# Altium PCB CurrentSource.PcbDoc
Units mil, origin at the board's own origin, x right, y up, seen from the top; angles counter-clockwise.
Board outline 6070 x 1885 mil, 4 copper layers (Top Layer, GND, Power lines, Bottom Layer), stack 21.708 mil thick; 64 components, 40 nets, 232 pads, 585 vias.
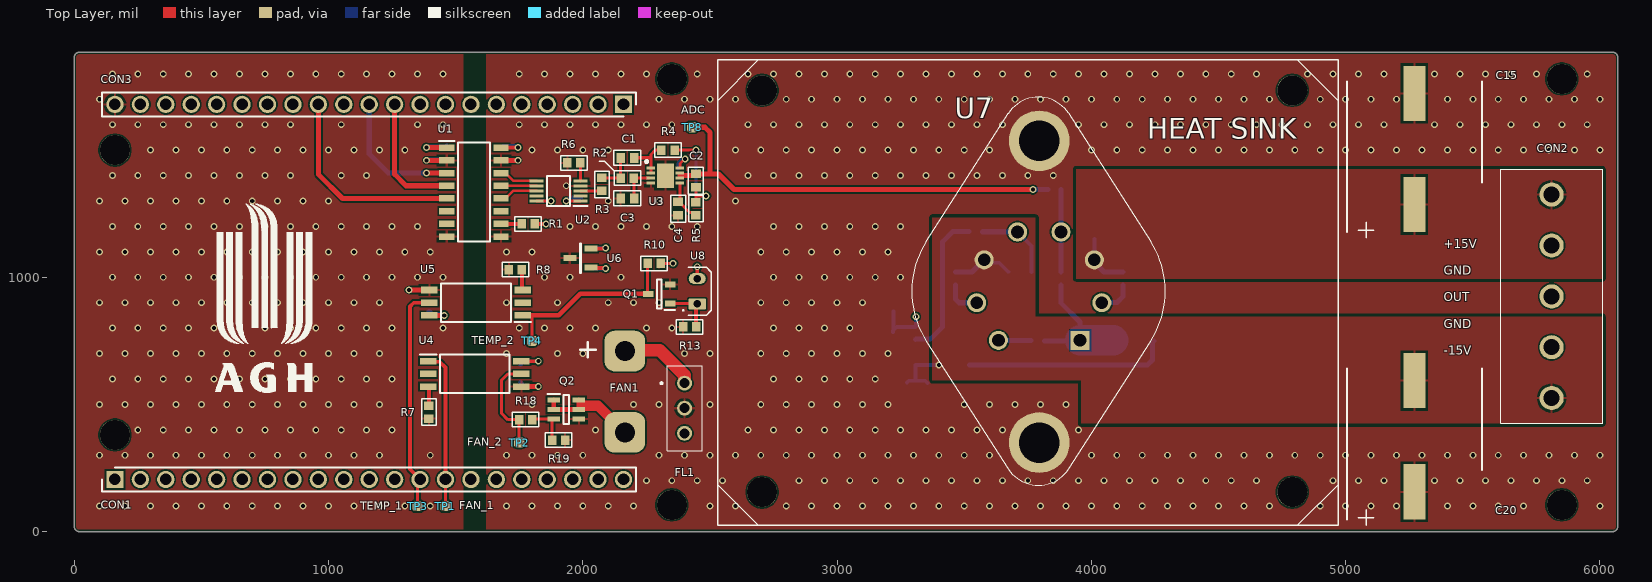
[diagram p0: Top Layer view]
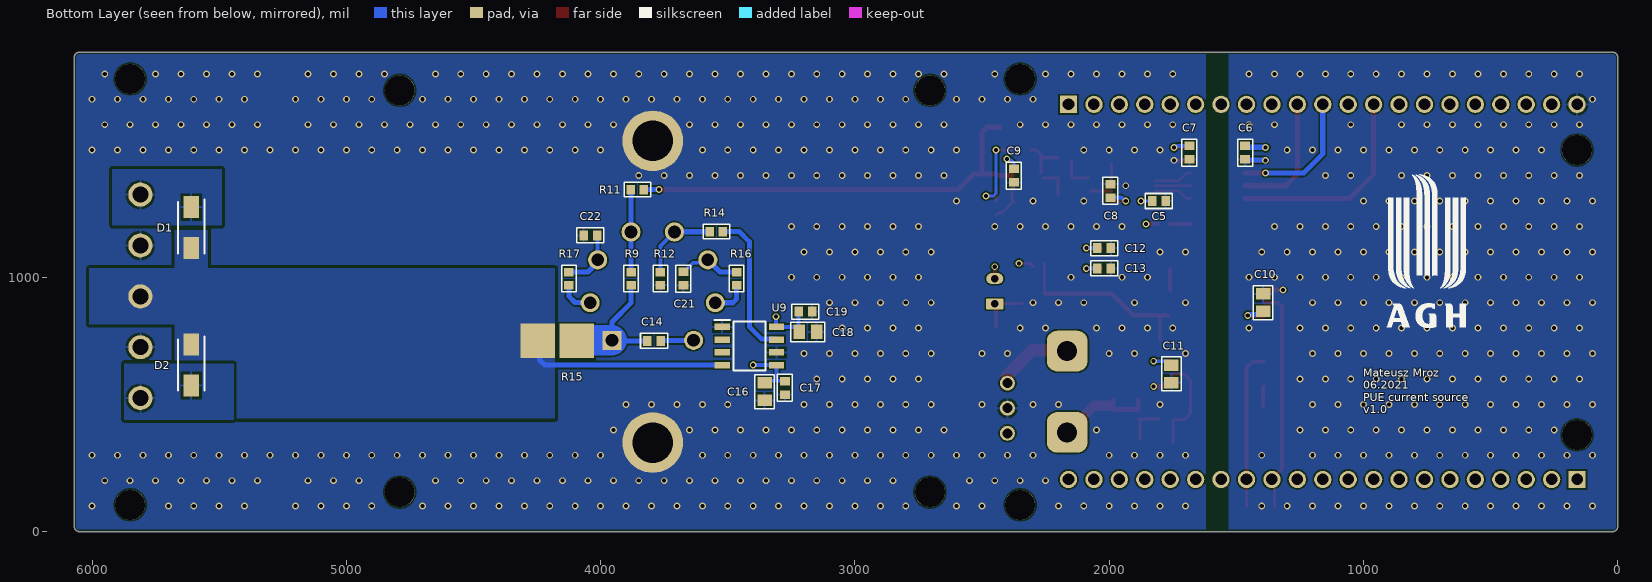
[diagram p1: Bottom Layer view, seen from below]
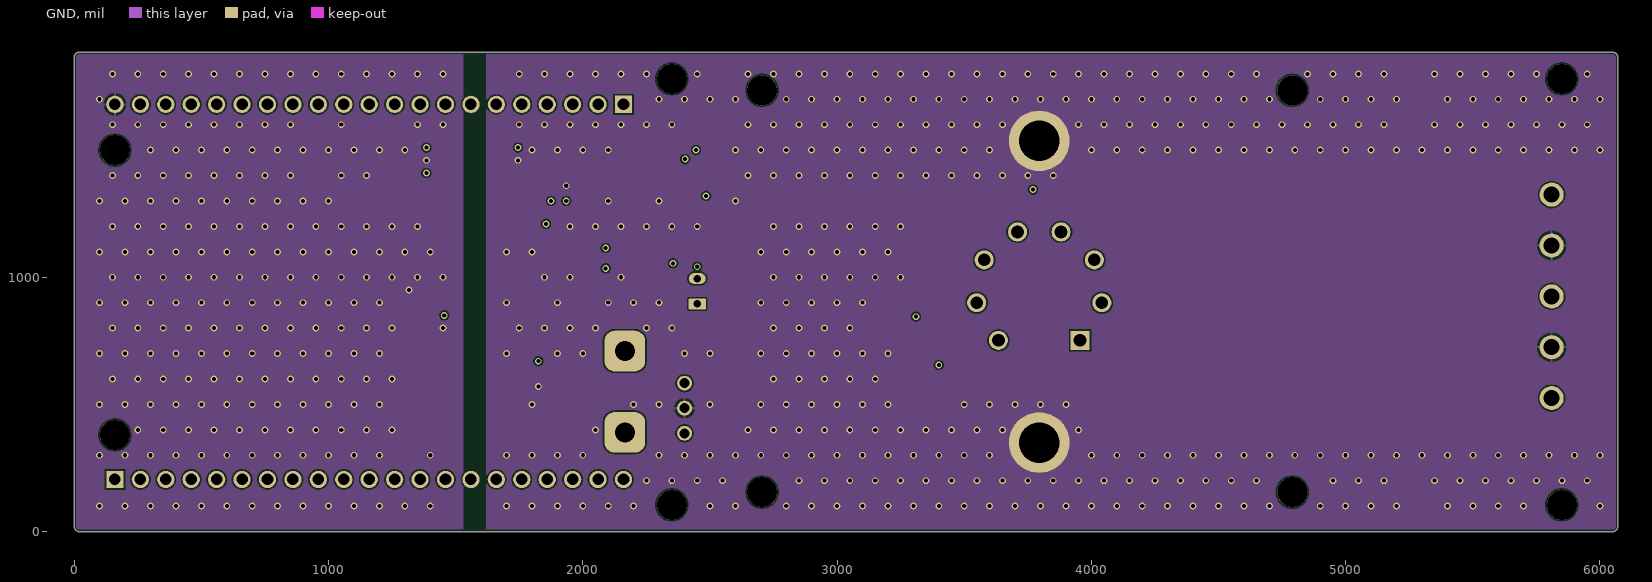
[diagram p2: GND]
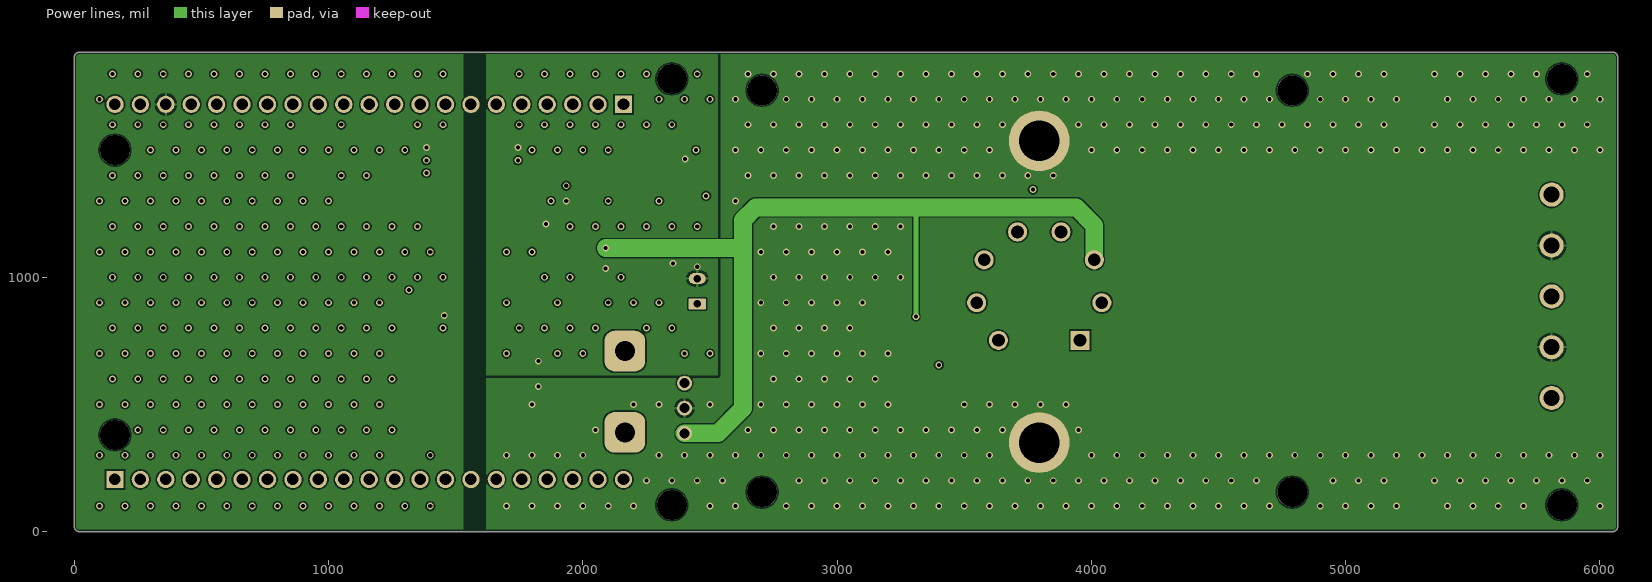
[diagram p3: Power lines]

## Layer stack, top to bottom
Top Solder: solder mask 0.4, Solder Resist, Dk 3.5
Top Layer: signal copper 1.4
Dielectric 2: prepreg 2.8, PP-006, Dk 4.1
GND: signal copper 0.354
Dielectric 1: dielectric 12.6, FR-4, Dk 4.8
Power lines: signal copper 0.354
Dielectric 3: prepreg 2.8, PP-006, Dk 4.1
Bottom Layer: signal copper 1.4
Bottom Solder: solder mask 0.4, Solder Resist, Dk 3.5

## Board outline
20,0 cw(c20,20) 0,20 0,1865 cw(c20,1865) 20,1885 6050,1885 cw(c6050,1865) 6070,1865 6070,20 cw(c6050,20) 6050,0

## Design rules (kind name [scope] priority, off if disabled: settings)
BoardOutlineClearance [All] p1: gap=8 ignorepadtopadclearanceinfootprint=FALSE
Clearance "Clerance poly" [InPolygon vs InPolygon] p1: gap=12 ignorepadtopadclearanceinfootprint=FALSE
Clearance [All] p2: gap=6 ignorepadtopadclearanceinfootprint=FALSE except(10: Arc-Via Track-Via)
HoleSize [All] p1: absolutevalues=TRUE maxlimit=248 minlimit=8 maxpercent=80.000 minpercent=20.000
MatchedLengths EEPROM_SPI_2 [InNetClass('EEPROM_SPI_2')] p1: tolerance=100 checknetsindiffpair=FALSE checkdiffpairvsdiffpair=TRUE checkxsignals=TRUE checkothers=TRUE
MatchedLengths EEPROM_SPI_1 [InNetClass('EEPROM_SPI_1')] p2: tolerance=10 checknetsindiffpair=FALSE checkdiffpairvsdiffpair=TRUE checkxsignals=TRUE checkothers=TRUE
MinimumAnnularRing [All] p1: minimumring=5.5
MinimumSolderMaskSliver [All] p1: minsoldermaskwidth=0
NetAntennae [All] p1: netantennaetolerance=3.94
PlaneConnect [Not IsVia] p1: planeconnectstyle=Relief reliefexpansion=20 reliefentries=4 reliefconductorwidth=10 reliefairgap=10
PlaneConnect PlaneConnect_via [IsVia] p2: planeconnectstyle=Direct reliefexpansion=20 reliefentries=4 reliefconductorwidth=10 reliefairgap=10
PlaneConnect PlaneConnect_out [NetCON2_3] p3: planeconnectstyle=Direct reliefexpansion=20 reliefentries=4 reliefconductorwidth=10 reliefairgap=10
PolygonConnect PolygonConnect_opamp [All vs HasFootprint('PA119CE')] p1: connectstyle=Direct reliefconductorwidth=10 reliefentries=4 polygonreliefangle="90 Angle" airgapwidth=10
PolygonConnect PolygonConnect_out [All vs InNet('NetCON2_3')] p2: connectstyle=Direct reliefconductorwidth=10 reliefentries=4 polygonreliefangle="90 Angle" airgapwidth=10
PolygonConnect PolygonConnect_via [All vs IsVia] p3: connectstyle=Direct reliefconductorwidth=10 reliefentries=4 polygonreliefangle="90 Angle" airgapwidth=10
PolygonConnect [All vs Not IsVia] p4: connectstyle=Relief reliefconductorwidth=10 reliefentries=4 polygonreliefangle="90 Angle" airgapwidth=10
RoutingVias [All] p1: holewidth=28 width=50 viastyle="Through Hole" minholewidth=8 minwidth=16 maxholewidth=28 maxwidth=50
SilkToSilkClearance [All] p1: silktosilkclearance=0
SilkToSolderMaskClearance [IsPad] p1: minsilkscreentomaskgap=6 clearancetoexposedcopper=TRUE
SolderMaskExpansion SolderMaskExpansion_via [IsVia] p1: expansion=4 istentingtop=TRUE
SolderMaskExpansion [All] p2: expansion=4 istentingtop=FALSE
UnRoutedNet [All] p1: checkbadconnections=TRUE
Width "Width Logo" [WithinRoom('Logo')] p1: maxlimit=10 minlimit=99999 preferedwidth=10 toplayer_minwidth=0 midlayer1_minwidth=0 midlayer2_minwidth=0 bottomlayer_minwidth=0 minimp=50.000000 maximp=50.000000 favimp=50.000000
Width [All] p2: maxlimit=150 minlimit=6 preferedwidth=10
23 further rules are at their usual default settings.

## Classes and differential pairs
component class Designator: C14 C15 C16 C17 C18 C19 C20 C21 C22 D1 D2 FAN1 FL1 Q1 Q2 R9 R10 R11 R12 R13 R14 R15 R16 R17 R18 R19 TP8 U7 U8 U9

## Components (designator, comment, footprint, x,y, rotation, side; value= is the part's Value field where it differs from the comment)
C1 "100p" Cap_0603_MD_outline 2175,1470 r180 top
C2 "100p" Cap_0603_MD_outline 2445,1380 r270 top
C3 "10p" Cap_0603_MD_outline 2175,1310 r0 top
C4 "10p" Cap_0603_MD_outline 2375,1270 r90 top
C5 "100n" Cap_0603_MD_outline 1805,1300 r0 bottom
C6 "100n" Cap_0603_MD_outline 1465,1490 r90 bottom
C7 "100n" Cap_0603_MD_outline 1685,1490 r90 bottom
C8 "100n" Cap_0603_MD_outline 1995,1340 r270 bottom
C9 "100n" Cap_0603_MD_outline 2375,1400 r90 bottom
C10 "1u" Cap_0805_MD_outline 1395,900 r270 bottom
C11 "1u" Cap_0805_MD_outline 1755,620 r90 bottom
C12 "100n" Cap_0603_MD_outline 2020,1115 r0 bottom
C13 "100n" Cap_0603_MD_outline 2020,1035 r0 bottom
C14 "82p" Cap_0603_MD_outline 3790,750 r180 bottom
C15 "1000u" CAPAE1350X1400N 5270,1505 r90 top
C16 "1u" Cap_0805_MD_outline 3355,550 r90 bottom
C17 "100n" Cap_0603_MD_outline 3275,565 r90 bottom
C18 "1u" Cap_0805_MD_outline 3185,785 r0 bottom
C19 "100n" Cap_0603_MD_outline 3195,865 r0 bottom
C20 "1000u" CAPAE1350X1400N 5270,375 r90 top
C21 "100n" Cap_0603_MD_outline 3675,995 r90 bottom
C22 "100n" Cap_0603_MD_outline 4040,1165 r180 bottom
CON1 "Socket 21" SOCKET_1X21_2.54 160,205 r0 top locked
CON2 "TB004-508-05BE" TB00450805BE 5810,525 r90 top
CON3 "Socket 21" SOCKET_1X21_2.54 2160,1680 r180 top locked
D1 "824500641" DIOM5127X250N 5610,1195 r270 bottom
D2 "824500641" DIOM5127X250N 5610,655 r270 bottom
FAN1 "Value" PADS_2 2165,550 r90 top
FL1 "DSS1NB32A222Q55B" DSS1NB32A223Q91A 2400,485 r270 top
Q1 "MMBT3904VL" SOT95P230X110-3N 2300,935 r180 top
Q2 "PMN30UNX" SOT95P275X110-6N 1935,480 r0 top
R1 "10k" Res_0603_MD_outline 1785,1210 r180 top
R2 "19k1" Res_0603_MD_outline 2175,1390 r0 top
R3 "5k36" Res_0603_MD_outline 2075,1365 r270 top
R4 "1k78" Res_0603_MD_outline 2335,1500 r0 top
R5 "57k6" Res_0603_MD_outline 2445,1270 r270 top
R6 "10k" Res_0603_MD_outline 1965,1450 r0 top
R7 "300R" Res_0603_MD_outline 1395,470 r90 top
R8 "300R" Res_0603_MD_outline 1735,1030 r0 top
R9 "470R" Res_0603_MD_outline 3880,995 r270 bottom
R10 "100k" Res_0603_MD_outline 2280,1055 r0 top
R11 "10k" Res_0603_MD_outline 3855,1345 r0 bottom
R12 "10k" Res_0603_MD_outline 3765,995 r90 bottom
R13 "7k5" Res_0603_MD_outline 2420,805 r0 top
R14 "470R" Res_0603_MD_outline 3545,1180 r0 bottom
R15 "0.047R" Res_2512 4170,750 r180 bottom
R16 "0.1R" Res_0603_MD_outline 3465,995 r90 bottom
R17 "0.1R" Res_0603_MD_outline 4125,995 r90 bottom
R18 "100R" Res_0603_MD_outline 1775,440 r180 top
R19 "10k" Res_0603_MD_outline 1905,360 r180 top
TP1 "FAN_1" TP_SQ40 1460,100 r90 top
TP2 "FAN_2" TP_SQ40 1750,350 r90 top
TP3 "TEMP_1" TP_SQ40 1350,100 r90 top
TP4 "TEMP_2" TP_SQ40 1800,750 r90 top
TP8 "ADC" TP_SQ40 2430,1590 r90 top
U1 "ADUM130E0BRZ" SOIC127P600X175-16N 1571.77,1335 r0 top
U2 "DAC80501ZDGST" SOP50P490X110-10N 1905,1340 r180 top
U3 "ADA4084" SON50P300X300X85-9N-D 2325,1400 r0 top
U4 "TLP5754H" SOIC127P1000X230-6N 1575,620 r0 top
U5 "TLP5754H" SOIC127P1000X230-6N 1580,900 r180 top
U6 "TLV76050DBZT" SOT95P237X112-3N 1990,1075 r180 top
U7 "PA119CE" PA119CE 3952.63,753.97 r90 top
U8 "Temp sensor" TO-92S 2450,945 r90 top
U9 "INA849DR" SOIC127P600X175-8N 3415,730 r180 bottom

## Footprints (in the part's own frame and the unit in brackets; to place one, negate y for a bottom-side part, rotate by r counter-clockwise, add the part's x,y. Pads: shape width x height; smd on the part's side, far side on the other; paste and mask are expansions set on the pad)
Cap_0603_MD_outline [mm] "Chip Capacitor, 0603, IPC Medium Density with outline"
  rect 0.85x1 smd: 1(-0.675,0) 2(0.675,0)
  silkscreen extent -1.35,-0.75 1.35,0.75, body extent -0.87,-0.48 0.87,0.48, height 0.92
Cap_0805_MD_outline [mm] "Chip Capacitor, 0805, IPC Medium Density with outline"
  rect 1.15x1.45 smd: 1(-0.875,0) 2(0.875,0)
  silkscreen extent -1.7,-0.97 1.7,0.97, body extent -1.1,-0.72 1.1,0.72, height 1.45
CAPAE1350X1400N [mm]
  rect 5.5x2.2 smd: 1(-5.55,0) 2(5.55,0)
  silkscreen extent -8.88,-6.75 6.75,6.75, body extent -7.5,-6.85 7.5,6.85, height 14
DIOM5127X250N [mm]
  rect 2.2x1.55 smd: 1(-2.05,0) 2(2.05,0)
  silkscreen extent -2.83,-1.34 2.56,1.34, body extent -2.55,-1.34 2.56,1.33, height 2.5
DSS1NB32A223Q91A [mm]
  round 1.5 hole 1: 1(-2.5,0) 2(0,0) 3(2.5,0)
  silkscreen extent -4.25,-2.4 4.25,1.75, body extent -3.77,-1.27 3.77,1.27, height 7.64
PA119CE [mm]
  rect 1.905x1.905 hole 1.27: 1(-0.051,-0.076)
  round 1.905 hole 1.27: 2(3.709,-2.246) 3(7.989,-1.496) 4(10.779,1.834) 5(10.779,6.174) 6(7.989,9.504) 7(3.709,10.254) 8(-0.051,8.084)
  round 6.06 hole 4.04: MH1(-10.261,4.004) MH2(19.879,4.004)
  silkscreen extent -14.53,-8.59 24.25,16.75, body extent -20.84,-16.6 31.82,27.08, height 22.86
PADS_2 [mil] "2 Pads, hole 2mm"
  rrect50% 160x160 hole 78.74: 1(-160,0) 2(160,0)
Res_0603_MD_outline [mm] "Chip Resistor, 0603, IPC Medium Density with outline"
  rect 0.85x0.95 smd: 1(-0.65,0) 2(0.65,0)
  silkscreen extent -1.33,-0.72 1.33,0.72, body extent -0.87,-0.48 0.87,0.48, height 0.5
Res_2512 [mm]
  rect 3.45x3.45 smd: 1(-1.95,0) 2(1.95,0)
  body extent -3.2,-1.6 3.2,1.6, height 0.55
SOCKET_1X21_2.54 [mm] "Socket connector 2.54mm"
  rect 1.725x1.725 hole 1.15: 1(0,0)
  round 1.725 hole 1.15: 2(2.54,0) 3(5.08,0) 4(7.62,0) 5(10.16,0) 6(12.7,0) 7(15.24,0) 8(17.78,0) 9(20.32,0) 10(22.86,0) 11(25.4,0) 12(27.94,0) 13(30.48,0) 14(33.02,0) 15(35.56,0) 16(38.1,0) 17(40.64,0) 18(43.18,0) 19(45.72,0) 20(48.26,0) 21(50.8,0)
  silkscreen extent -1.27,-1.2 52.07,1.2, body extent -1.52,-1.27 52.19,1.27, height 8.5
SOIC127P600X175-8N [mm]
  rect 1.525x0.65 smd: 1(-2.712,1.905) 2(-2.712,0.635) 3(-2.712,-0.635) 4(-2.712,-1.905) 5(2.712,-1.905) 6(2.712,-0.635) 7(2.712,0.635) 8(2.712,1.905)
  silkscreen extent -3.47,-2.45 1.6,2.58, body extent -3,-2.45 3,2.45, height 1.75
SOIC127P600X175-16N [mm]
  rect 1.525x0.65 smd: 1(-2.712,4.445) 2(-2.712,3.175) 3(-2.712,1.905) 4(-2.712,0.635) 5(-2.712,-0.635) 6(-2.712,-1.905) 7(-2.712,-3.175) 8(-2.712,-4.445) 9(2.712,-4.445) 10(2.712,-3.175) 11(2.712,-1.905) 12(2.712,-0.635) 13(2.712,0.635) 14(2.712,1.905) 15(2.712,3.175) 16(2.712,4.445)
  silkscreen extent -3.47,-4.95 1.6,5.12, body extent -3,-4.95 3,4.95, height 1.75
SOIC127P1000X230-6N [mm]
  rect 1.65x0.65 smd: 1(-4.65,1.27) 2(-4.65,0) 3(-4.65,-1.27) 4(4.65,-1.27) 5(4.65,0) 6(4.65,1.27)
  silkscreen extent -5.48,-1.92 3.47,1.94, body extent -5,-1.92 5,1.92, height 2.3
SON50P300X300X85-9N-D [mm]
  rect 0.85x0.3 smd: 1(-1.45,0.75) 2(-1.45,0.25) 3(-1.45,-0.25) 4(-1.45,-0.75) 5(1.45,-0.75) 6(1.45,-0.25) 7(1.45,0.25) 8(1.45,0.75)
  rect 1.7x2.44 smd: 4(0,0)
  silkscreen extent -2,1.28 -1.75,1.52, body extent -1.55,-1.5 1.55,1.5, height 0.85
SOP50P490X110-10N [mm]
  rect 1.4x0.3 smd: 1(-2.2,1) 2(-2.2,0.5) 3(-2.2,0) 4(-2.2,-0.5) 5(-2.2,-1) 6(2.2,-1) 7(2.2,-0.5) 8(2.2,0) 9(2.2,0.5) 10(2.2,1)
  silkscreen extent -2.9,-1.5 1.15,1.5, body extent -2.45,-1.5 2.45,1.5, height 1.1
SOT95P230X110-3N [mm]
  rect 1.05x0.6 smd: 1(-1.1,0.95) 2(-1.1,-0.95) 3(1.1,0)
  silkscreen extent -1.6,-1.45 0.23,1.6, body extent -1.15,-1.45 1.15,1.45, height 1.1
SOT95P237X112-3N [mm]
  rect 1.3x0.6 smd: 1(-1.05,0.95) 2(-1.05,-0.95) 3(1.05,0)
  silkscreen extent -0.05,-1.46 0.05,1.46, body extent -1.18,-1.46 1.18,1.46, height 1.12
SOT95P275X110-6N [mm]
  rect 1.25x0.5 smd: 1(-1.25,0) 1(-1.25,0.95) 1(1.25,0) 1(1.25,0.95) 3(-1.25,-0.95) 4(1.25,-0.95)
  silkscreen extent -1.88,-1.45 0.28,1.55, body extent -1.37,-1.47 1.38,1.48, height 1.01
TB00450805BE [mm]
  round 2.4 hole 1.6: 1(0,0) 2(5.08,0) 3(10.16,0) 4(15.24,0) 5(20.32,0)
  silkscreen extent -2.54,-5.08 22.86,5.08, body extent -3.09,-5.12 22.91,5.08, height 14.1
TO-92S [mm] "TI 2 Pin temp sensor"
  rrect10% 1.07x1.7 hole 0.75: 1(-1.27,0)
  rrect100% 1.07x1.7 hole 0.75: 2(1.27,0)
  silkscreen extent -2.41,-1.4 2.41,1.45, body extent -2.05,-1.07 2.05,0.55, height 7.33
TP_SQ40 [mil] "Testpoint square 40x40mil"
  rrect50% 40x40 smd: 1(0,0)

## Part data
C1 C2: library part Capacitor, "Capacitor", MPN=GQM1875C2E101JB12D, Package=0603
C3 C4: library part Capacitor, "Capacitor", MPN=GRM1885C2E100JW07D, Package=0603
C5 C6 C7 C8 C9 C12 C13 C17 C19 C21 C22: library part Capacitor, "Capacitor", MPN=GRM188R72A104KA35, Package=0603
C10 C11: library part Capacitor, "Capacitor", MPN=GRM219R7YA105KA12, Package=0805
C14: library part Capacitor, "Capacitor", MPN=GQM1875C2E820JB12D, Package=0603
C15 C20: library part "Capacitor Electrolytic", "Aluminium Electrolytic Capacitor", MPN=EEE-FK1E102AQ
C16 C18: library part Capacitor, "Capacitor", MPN=GCJ21BR71H105KA01L, Package=0803
CON1 CON3: "Socket, 21-Pin", System=Connector
  CON1: Location=Bottom
  CON3: Location=Top
CON2: "Terminal Block Screw", MPN=TB004-508-05BE
D1 D2: "TVS Diode", MPN=824500641
FAN1: library part Pads_2, "2 Pads"
FL1: "EMIFilter", MPN=DSS1NB32A222Q55B
Q1: "Transistor BJT NPN", MPN=MMBT3904VL
Q2: "Transistor MOSFET N-Channel", MPN=PMN30UNX
R1 R6 R19: library part Resistor, "Resistor", MPN=CRCW060310K0FKEAC, Package=0603
R2: library part Resistor, "Resistor", MPN=CRCW060319K1FKTA, Package=0603
R3: library part Resistor, "Resistor", MPN=CRCW06035K36FKEA, Package=0603
R4: library part Resistor, "Resistor", MPN=CRCW06031K78FKTA, Package=0603
R5: library part Resistor, "Resistor", MPN=CRCW060357K6FKEA, Package=0603
R7 R8: library part Resistor, "Resistor", MPN=CRCW0603300RFKEAC, Package=0603
R9 R14: library part Resistor, "Resistor", MPN=MCT0603MD4700BP100, Package=0603
R10: library part Resistor, "Resistor", MPN=CRCW0603100KFKEAC, Package=0603
R11 R12: library part Resistor, "Resistor", MPN=MCT06030E1002BP100, Package=0603
R13: library part Resistor, "Resistor", MPN=CRCW06037K50FKEA, Package=0603
R15: library part Shunt, "Resistor", MPN=GMR100HTBFQR047, Package=2512
R16 R17: library part Resistor, "Resistor", MPN=RCWE0603R100FNEA, Package=0603
R18: library part Resistor, "Resistor", MPN=CRCW0603100RFKEAHP, Package=0603
TP1 TP2 TP3 TP4 TP8: library part TestPoint, "Test point"
U1: "Digital isolator", MPN=ADUM130E0BRZ
U2: "DAC", MPN=DAC80501ZDGST, Resolution=16bit
U3: library part ADA4084-2ACPZ-R7, "Op Amp", MPN=ADA4084-2ACPZ-R7
U4 U5: "Optocoupler", MPN=TLP5754H(TP4,E
U6: "Voltage Regulator 5V", MPN=TLV76050DBZT
U7: "Op Amp", MPN=PA119CE
U8: library part LMT01LPGM, "Temperature sensor, Pulse Train Interface", MPN=LMT01LPGM
U9: "Instrumental Amplifier", MPN=INA849DR

## Free pads (board coordinates)
  round 118.11 hole 118.11: ""(160,380) ""(160,1500) ""(2350,105) ""(2350,1780) ""(2705,155) ""(2705,1735) ""(4790,155) ""(4790,1735) ""(5850,105) ""(5850,1780)

## Via types
v1: diameter 27, hole 16, Top Layer to Bottom Layer, tented both sides, 585 vias

## Nets (pads, with @x,y where several pads share a name; then routed paths per layer and width w, separated by ;. In a path a pad name is that pad's centre, name@x,y a point inside that pad or via, vN(x,y) a via of type N, cw(c..) or ccw(c..) an arc to the next point about the centre after c; other vN are vias at no path point)
+5: C7.2 C8.2 C9.2 C11.2 C13.2 R1.1 R10.2 U1.16 U2.1 U3.8 U4.6 U6.1 U8.2 | length 756.6
  Top Layer w12: v1(1935,1300) 1935.54,1300.54 U2.1@1991.52,1300.54 ; R10.2@2300,1041.5 2305.59,1047.09 R10.2 v1(2355,1055) ; U3.8 2382.09,1447.09 2399.72,1464.72 v1(2402.6,1464.72) ; U8.2 v1(2450,1041.5)
  Top Layer w15: U1.16 v1(1745,1510) ; U4.6 v1(1825,670) ; R1.1 v1(1855,1210) ; U6.1 2032.64,1036.3 2088.7,1036.3 v1(2090,1035)
  Bottom Layer w12: C9.2 2375,1450 2386.85,1461.85 2399.73,1461.85 v1(2402.6,1464.72)
  Bottom Layer w15: C7.2 1735.18,1516.57 1741.75,1510 v1(1745,1510) ; C11.2 1770.14,669.59 1788.59,669.59 1789,670 v1(1825,670) ; v1(1935,1300) 1938.25,1300 1951.67,1313.43 C8.2 ; C13.2 v1(2090,1035)
+15: C12.2 C15.1 C18.2 C19.2 C22.2 CON2.5 D1.1 FL1.3 R17.2 U6.2 U7.3 U9.8 | length 4085.5
  Top Layer w15: U6.2 2032.64,1113.7 2088.7,1113.7 v1(2090,1115)
  Power lines w20: v1(3310,845) 3310,1275
  Power lines w70: v1(2090,1115) 2630,1115 ; FL1.3 2531.57,386.57 2630,485 2630,1115 ; U7.3 4011.54,1203.46 3940,1275 3310,1275 2680,1275 2630,1225 2630,1115
  Bottom Layer w15: C12.2 v1(2090,1115) ; C18.2 3219.45,789.86 C18.2@3221.57,791.99 ; C19.2 C18.2@3221.57,791.99 ; v1(3310,845) 3310,806.77 U9.8 3234.59,805 C18.2@3221.57,791.99 ; U7.3@4011.54,1058.46 U7.3 4012.48,1069.45 C22.2@4012.48,1150
  Bottom Layer w20: U7.3@4011.54,1058.46 4049.41,1020.59 R17.2
-15: C16.2 C17.2 C20.2 C21.2 CON2.1 D2.2 R16.2 U7.6 U9.5 | length 489.2
  Bottom Layer w15: C17.2@3275,586.57 3281.66,593.24 3308.23,593.24 ; C16.2 3346.21,593.24 3308.23,593.24 ; v1(3400,655) U9.5 3308.23,593.24 ; U7.6 3589.94,1057.02 3636.6,1057.02 3672.05,1021.57 C21.2
  Bottom Layer w20: R16.2 3530.55,1020.59 U7.6
AGND: C3.1 C4.1 C5.1 C7.1 C8.1 C9.1 C11.1 C12.1 C13.1 C15.2 C16.1 C17.1 C18.1 C19.1 C20.1 C21.1 C22.1 CON2.2 CON2.4 FL1.2 Q1.2 Q2.4 R6.1 R8.1 R12.1 R13.1 R19.1 U1.9 U1.15 U2.4 U3.4 U4.4 U6.3 U7.MH1 U7.MH2 U9.1 U9.6 | length 151.6
  Top Layer w20: U1.15 v1(1745,1460) ; U4.4 v1(1825,570)
  Bottom Layer w20: C11.1 C11.1@1767.64,572.91 ; v1@1824.74,569.74 v1(1825,570)
  other v1: 1700,100 1800,100 1900,100 2000,100 2100,100 2200,100 2500,100 2600,100 2800,100 2900,100 3000,100 3100,100 3200,100 3300,100 3400,100 3500,100 3600,100 3700,100 3800,100 3900,100 4000,100 4100,100 4200,100 4300,100 4400,100 4500,100 4600,100 4700,100 4900,100 5000,100 5100,100 5200,100 5400,100 5500,100 5600,100 5700,100 6000,100 2250,200 2350,200 2450,200 2550,200 2850,200 2950,200 3050,200 3150,200 3250,200 3350,200 3450,200 3550,200 3650,200 3750,200 3850,200 3950,200 4050,200 4150,200 4250,200 4350,200 4450,200 4550,200 4650,200 4950,200 5050,200 5150,200 5350,200 5450,200 5550,200 5650,200 5750,200 5850,200 5950,200 1700,300 1800,300 1900,300 2000,300 2300,300 2400,300 2500,300 2600,300 2700,300 2800,300 2900,300 3000,300 3100,300 3200,300 3300,300 3400,300 3500,300 3600,300 4000,300 4100,300 4200,300 4300,300 4400,300 4500,300 4600,300 4700,300 4800,300 4900,300 5000,300 5100,300 5200,300 5300,300 5400,300 5500,300 5600,300 5700,300 5800,300 5900,300 6000,300 2050,400 2650,400 2750,400 2850,400 2950,400 3050,400 3150,400 3250,400 3350,400 3450,400 3550,400 3650,400 3950,400 1800,500 2200,500 2300,500 2500,500 2700,500 2800,500 2900,500 3000,500 3100,500 3200,500 3500,500 3600,500 3700,500 3800,500 3900,500 2750,600 2850,600 2950,600 3050,600 3150,600 1700,700 1900,700 2000,700 2400,700 2500,700 2700,700 2800,700 2900,700 3000,700 3100,700 3200,700 1750,800 1850,800 1950,800 2050,800 2250,800 2350,800 2750,800 2850,800 2950,800 3050,800 1700,900 1900,900 2100,900 2200,900 2300,900 2700,900 2800,900 2900,900 3000,900 3100,900 1850,1000 1950,1000 2150,1000 2750,1000 2850,1000 2950,1000 3050,1000 3150,1000 3250,1000 1700,1100 1800,1100 2700,1100 2800,1100 2900,1100 3000,1100 3100,1100 3200,1100 1950,1200 2050,1200 2150,1200 2250,1200 2350,1200 2450,1200 2750,1200 2850,1200 2950,1200 3050,1200 3150,1200 3250,1200 2100,1300 2300,1300 2600,1300 1935,1360 2650,1400 2750,1400 2850,1400 2950,1400 3050,1400 3150,1400 3250,1400 3350,1400 3450,1400 3550,1400 3650,1400 3750,1400 3850,1400 1800,1500 1900,1500 2000,1500 2100,1500 2600,1500 2700,1500 2800,1500 2900,1500 3000,1500 3100,1500 3200,1500 3300,1500 3400,1500 3500,1500 3600,1500 4000,1500 4100,1500 4200,1500 4300,1500 4400,1500 4500,1500 4600,1500 4700,1500 4800,1500 4900,1500 5000,1500 5100,1500 5200,1500 5300,1500 5400,1500 5500,1500 5600,1500 5700,1500 5800,1500 5900,1500 6000,1500 1750,1600 1850,1600 1950,1600 2050,1600 2150,1600 2250,1600 2350,1600 2650,1600 2750,1600 2850,1600 2950,1600 3050,1600 3150,1600 3250,1600 3350,1600 3450,1600 3550,1600 3650,1600 3950,1600 4050,1600 4150,1600 4250,1600 4350,1600 4450,1600 4550,1600 4650,1600 4750,1600 4850,1600 4950,1600 5050,1600 5150,1600 5350,1600 5450,1600 5550,1600 5650,1600 5750,1600 5850,1600 5950,1600 2300,1700 2400,1700 2500,1700 2600,1700 2800,1700 2900,1700 3000,1700 3100,1700 3200,1700 3300,1700 3400,1700 3500,1700 3600,1700 3700,1700 3800,1700 3900,1700 4000,1700 4100,1700 4200,1700 4300,1700 4400,1700 4500,1700 4600,1700 4700,1700 4900,1700 5000,1700 5100,1700 5200,1700 5400,1700 5500,1700 5600,1700 5700,1700 5800,1700 5900,1700 6000,1700 1750,1800 1850,1800 1950,1800 2050,1800 2150,1800 2250,1800 2450,1800 2650,1800 2750,1800 2850,1800 2950,1800 3050,1800 3150,1800 3250,1800 3350,1800 3450,1800 3550,1800 3650,1800 3750,1800 3850,1800 3950,1800 4050,1800 4150,1800 4250,1800 4350,1800 4450,1800 4550,1800 4650,1800 4850,1800 4950,1800 5050,1800 5150,1800 5350,1800 5450,1800 5550,1800 5650,1800 5750,1800 5950,1800
EXT_3V3: C6.2 C10.2 CON3.19 U1.1 U5.6 | length 294.5
  Top Layer w20: v1(1385,1510) U1.1 ; U5.6@1391.93,850 v1(1455,850)
  Power lines w20: CON3.19 CON3.19@361.57,1678.43
  Bottom Layer w20: v1(1385,1510) 1386.34,1511.34 1459.76,1511.34 C6.2 ; C10.2 1407.64,852.91 1450.19,852.91 1453.11,850 v1(1455,850)
GND: C6.1 C10.1 CON3.21 R7.1 U1.2 U1.8 U5.4 | length 240.2
  Top Layer w20: v1@1315,950 U5.4@1391.93,950 ; v1(1385,1460) U1.2
  Bottom Layer w20: v1@1315,950 v1(1316.89,950) ; v1(1385,1460) 1386.34,1461.34 1462.91,1461.34 C6.1
  other v1: 100,100 200,100 300,100 400,100 500,100 600,100 700,100 800,100 900,100 1000,100 1100,100 1200,100 1300,100 1400,100 100,300 200,300 300,300 400,300 500,300 600,300 700,300 800,300 900,300 1000,300 1100,300 1200,300 1400,300 250,400 350,400 450,400 550,400 650,400 750,400 850,400 950,400 1050,400 1150,400 1250,400 100,500 200,500 300,500 400,500 500,500 600,500 700,500 800,500 900,500 1000,500 1100,500 1200,500 150,600 250,600 350,600 450,600 550,600 650,600 750,600 850,600 950,600 1050,600 1150,600 1250,600 100,700 200,700 300,700 400,700 500,700 600,700 700,700 800,700 900,700 1000,700 1100,700 1200,700 150,800 250,800 350,800 450,800 550,800 650,800 750,800 850,800 950,800 1050,800 1150,800 1250,800 1450,800 100,900 200,900 300,900 400,900 500,900 600,900 700,900 800,900 900,900 1000,900 1100,900 1200,900 150,1000 250,1000 350,1000 450,1000 550,1000 650,1000 750,1000 850,1000 950,1000 1050,1000 1150,1000 1250,1000 1350,1000 1450,1000 100,1100 200,1100 300,1100 400,1100 500,1100 600,1100 700,1100 800,1100 900,1100 1000,1100 1100,1100 1200,1100 1300,1100 1400,1100 150,1200 250,1200 350,1200 450,1200 550,1200 650,1200 750,1200 850,1200 950,1200 1050,1200 1150,1200 1250,1200 1350,1200 100,1300 200,1300 300,1300 400,1300 500,1300 600,1300 700,1300 800,1300 900,1300 1000,1300 150,1400 250,1400 350,1400 450,1400 550,1400 650,1400 750,1400 850,1400 1050,1400 1150,1400 300,1500 400,1500 500,1500 600,1500 700,1500 800,1500 900,1500 1000,1500 1100,1500 1200,1500 1300,1500 150,1600 250,1600 350,1600 450,1600 550,1600 650,1600 750,1600 850,1600 1050,1600 1350,1600 1450,1600 100,1700 150,1800 250,1800 350,1800 450,1800 550,1800 650,1800 750,1800 850,1800 950,1800 1050,1800 1150,1800 1250,1800 1350,1800 1450,1800
NetC1_1: C1.1 R4.1 U3.1 U3.2 | length 188
  Top Layer w12: C1.1 2267.91,1470 ; U3.2 U3.1 2267.91,1452.97 2267.91,1470 ; R4.1 2285,1500 2267.91,1482.91 2267.91,1470
NetC1_2: C1.2 R2.1 R3.1 | length 139.2
  Top Layer w12: R3.1@2080.59,1390 R2.1 2148.92,1390.49 2148.92,1459.51 C1.2@2148.43,1460
NetC2_1: C2.1 R11.1 TP8.1 U3.6 U3.7 | length 1719.9
  Top Layer w12: C2.1@2432.08,1400 2441.83,1409.75 C2.1
  Top Layer w20: 2382.09,1400 C2.1@2432.08,1400 ; TP8.1 2480,1590 2500,1570 2500,1406.57 ; C2.1 2500,1406.57 ; v1(3770,1345) 2595,1345 2533.43,1406.57 2500,1406.57
  Bottom Layer w20: v1(3770,1345) R11.1
NetC2_2: C2.2 R4.2 R5.1 | length 398.3
  Top Layer w12: R4.2 v1(2445,1500) ; R5.1 2445,1324.51 ; C2.2 2445,1324.51 ; v1(2485,1320) 2449.51,1320 2445,1324.51
  Bottom Layer w12: v1(2445,1500) 2445,1330 2455,1320 v1(2485,1320)
NetC3_2: C3.2 R2.2 U3.3 | length 129.4
  Top Layer w11: R2.2 U3.3@2259.56,1390
  Top Layer w12: R2.2 2201.08,1389.51 2201.08,1320.49 C3.2@2201.57,1320
NetC4_2: C4.2 R5.2 U3.5 | length 168.6
  Top Layer w12: U3.5@2382.18,1370.57 U3.5 2382.09,1303.66 C4.2 2377.95,1296.57 2419.39,1255.14 2434.27,1255.14 R5.2
NetC5_2: C5.2 U2.10 | length 100.3
  Top Layer w12: U2.10 1818.48,1300.54 1874.46,1300.54 v1(1875,1300)
  Bottom Layer w12: C5.2 v1(1875,1300)
NetC14_1: C14.1 R9.2 R15.2 U7.1 | length 518.1
  Bottom Layer w15: U7.1@3953.66,750 U7.1 U7.1@3955.83,751.77
  Bottom Layer w20: C14.1 U7.1@3953.66,750 ; R9.2 3880,900 3955.63,824.37 U7.1
  Bottom Layer w120: U7.1@3955.83,751.77 R15.2@4085,751.77
NetC14_2: C14.2 U7.8 | length 129.9
  Bottom Layer w15: U7.8 U7.8@3635.35,750.98 ; C14.2@3762.44,750.98 C14.2
  Bottom Layer w20: U7.8@3635.35,750.98 C14.2@3762.44,750.98
NetCON1_13: CON1.13 TP3.1 U5.5 | length 886.5
  Top Layer w12: TP3.1@1350,97.33 CON1.13@1350,182.03
  Top Layer w15: CON1.13 1320,245 1320,885 1335,900 U5.5@1391.93,900
  Top Layer w20: CON1.13@1350,182.03 1360,192.03 CON1.13
NetCON1_14: CON1.14 TP1.1 U4.1 | length 623.4
  Top Layer w12: TP1.1 CON1.14
  Top Layer w15: U4.1 1393.94,667.99 1437.01,667.99 1460,645 CON1.14
NetCON2_3: CON2.3 D1.2 D2.1 R15.1 U9.4 | length 804.3
  Bottom Layer w20: U9.4 4220,655 4240,675 4240,743.23 R15.1
NetCON3_10: CON3.10 U1.4 | length 498.6
  Top Layer w20: CON3.10 1260,1405 1305,1360 U1.4
NetCON3_11: CON3.11 U1.3 | length 536.1
  Top Layer w20: v1@1380,1410 v1(1385,1410) U1.3
  Bottom Layer w20: CON3.11 1160,1485 1235,1410 v1(1385,1410)
NetCON3_13: CON3.13 U1.5 | length 819.4
  Top Layer w20: CON3.13 960,1405 1055,1310 U1.5
NetFAN1_1: FAN1.1 Q2.1 | length 382.5
  Top Layer w18: Q2.1@1885.79,517.4 1885.79,480 1984.21,480 Q2.1@1984.21,517.4
  Top Layer w40: 1999.21,495 2060,495 FAN1.1
NetFAN1_2: FAN1.2 FL1.1 | length 308.8
  Top Layer w40: FAN1.2 FAN1.2@2168.43,713.43
  Top Layer w50: FAN1.2@2168.43,713.43 2301.57,713.43 2400,615 FL1.1
NetQ1_1: Q1.1 R13.2 U8.1 | length 199.6
  Top Layer w12: Q1.1 2447.4,897.6 U8.1
  Top Layer w15: R13.2 2445.59,890.59 U8.1
NetQ1_3: Q1.3 R10.1 TP4.1 U5.1 | length 759.4
  Top Layer w12: U5.1 1790,850 1800,840 TP4.1 ; Q1.3@2254.41,937.28 R10.1
  Top Layer w18: U5.1@1780,850 1790,850 1905,850 1990,935 2252.13,935 Q1.3@2254.41,937.28
NetQ2_3: Q2.3 R18.1 R19.2 | length 166.8
  Top Layer w12: R18.1@1803.19,442.6 Q2.3@1883.25,442.6 ; R19.2 1879.41,438.76 Q2.3@1883.25,442.6 ; Q2.3 Q2.3@1883.25,442.6
NetR1_2: R1.2 U1.10 | length 80.9
  Top Layer w15: U1.10 R1.2
NetR3_2: R3.2 U2.3 | length 83.6
  Top Layer w12: U2.3 1991.71,1339.91 2074.5,1339.91 R3.2
NetR6_2: R6.2 U2.5 | length 71.6
  Top Layer w12: R6.2 1990.59,1379.46 1990.68,1379.37 U2.5
NetR7_2: R7.2 U4.3 | length 75.7
  Top Layer w15: U4.3 1395,566.93 R7.2
NetR8_2: R8.2 U5.3 | length 81
  Top Layer w15: U5.3@1758.07,950 1760.59,952.52 R8.2
NetR9_1: R9.1 R11.2 U7.4 | length 324.7
  Bottom Layer w15: R9.1 R9.1@3880.22,1020.81 ; U7.4@3880.22,1178.13 U7.4 U7.4@3880.51,1178.43 ; R11.2@3880.51,1344.92 R11.2
  Bottom Layer w20: R9.1@3880.22,1020.81 U7.4@3880.22,1178.13 ; U7.4@3880.51,1178.43 R11.2@3880.51,1344.92
NetR12_2: R12.2 R14.2 U7.5 | length 320.4
  Bottom Layer w15: R14.2 R14.2@3571.42,1179.17 ; U7.5@3708.74,1179.17 U7.5 3765,1122.91 R12.2
  Bottom Layer w20: R14.2@3571.42,1179.17 U7.5@3708.74,1179.17
NetR14_1: R14.1 U9.7 | length 583.5
  Bottom Layer w20: U9.7 3311.02,757.8 3367.8,757.8 3415,805 3415,1140 3455,1180 R14.1
NetR18_2: R18.2 TP2.1 U4.5 | length 388.4
  Top Layer w12: TP2.1 1749.7,350.3 1749.7,439.7 R18.2 1705,440 1680,465 1680,595 1705,620 U4.5
RCL+: R17.1 U7.2 | length 139.1
  Bottom Layer w15: U7.2@4041.36,899.7 U7.2 U7.2@4042.13,901.06
  Bottom Layer w20: U7.2@4042.13,901.06 4101.06,901.06 4125,925 R17.1
RCL-: R16.1 U7.7 | length 145
  Bottom Layer w15: U7.7@3548.64,899.7 U7.7
  Bottom Layer w20: R16.1 3465,915 3480,900 U7.7
SCL: U1.14 U2.6 | length 152.5
  Top Layer w10: U1.14 1695.77,1410 1725.77,1380 1817.76,1380 U2.6
SDA: U1.12 U2.8 | length 152.3
  Top Layer w10: U1.12 1695.77,1310 1725.77,1340 U2.8
SYNC: U1.13 U2.7 | length 140
  Top Layer w10: U1.13 1678.7,1359.84 1818.23,1359.84 U2.7
pads on no net: CON1.1 CON1.2 CON1.3 CON1.4 CON1.5 CON1.6 CON1.7 CON1.8 CON1.9 CON1.10 CON1.11 CON1.12 CON1.15 CON1.16 CON1.17 CON1.18 CON1.19 CON1.20 CON1.21 CON3.1 CON3.2 CON3.3 CON3.4 CON3.5 CON3.6 CON3.7 CON3.8 CON3.9 CON3.12 CON3.14 CON3.15 CON3.16 CON3.17 CON3.18 CON3.20 U1.6 U1.7 U1.11 U2.2 U2.9 U4.2 U5.2 U9.2 U9.3

## Polygon pours and split planes (outlines as drawn)
GND on Top Layer "GND" (solid, pour order 0): 0,1885 0,0 1530,0 1530,1885
+15 on Top Layer "+15V" (solid, pour order 9): 6010,1215 6010,995 3940,995 3940,1425 6010,1425
-15 on Top Layer "-15V" (solid, pour order 15): 3375,1235 3780,1235 3780,845 6010,845 6010,425 3960,425 3960,595 3375,595
AGND on Top Layer "AGND" (solid, pour order 18): 1620,1885 1620,0 6070,0 6070,1885
GND on GND "GND" (solid, pour order 2): 0,1885 1530,1885 1530,0 0,0
AGND on GND "AGND" (solid, pour order 22): 1620,1885 1620,5 6070,5 6070,1885
EXT_3V3 on Power lines "tg" (solid, pour order 5): 0,1885 1530,1885 1530,0 0,0
+5 on Power lines "5V" (solid, pour order 8): 1620,1883.95 1620,615 2530,615 2530,1883.95
AGND on Power lines "AGND" (solid, pour order 23): 1620,1876.84 1620,0 6070,0 6070,1885
-15 on Bottom Layer "-15V" (solid, pour order 6): 5442.64,660.64 5872.64,660.64 5872.64,440.64 5442.64,440.64
+15 on Bottom Layer "+15V" (solid, pour order 7): 5490,1425 5920,1425 5920,1205 5490,1205
GND on Bottom Layer "GND" (solid, pour order 12): 0,1885 1530,1885 1530,0 0,0
NetCON2_3 on Bottom Layer "GND" (solid, pour order 14): 5545,1185 5675,1185 5675,660 5545,660
NetCON2_3 on Bottom Layer "OUT" (solid, remove dead copper, pour order 20): 6010,1035 5675,1035 5675,1185 5545,1185 5545,1035 4180,1035 4180,665 4180,445 5675,445 5675,660 5675,815 6010,815
AGND on Bottom Layer "AGND" (solid, remove dead copper, pour order 21): 1620,1885 1620,0 6070,0 6070,1885

## Silkscreen, mask and mechanical layers (free items; w line width, h text height)
Top Overlay:
  drawing of 30 lines, arcs and shapes, not listed
  text "HEAT SINK" at 4220,1545 h80
  text "+15V /  / GND /  / OUT /  / GND /  / -15V" at 5385.54,695 h35
Bottom Overlay:
  drawing of 18 lines, arcs and shapes, not listed
  text "Mateusz Mroz / 06.2021 / PUE current source / v1.0" at 1000,465 h32
Bottom Solder:
  rectangle: 4190,455 5420,655
  rectangle: 4185,685 5550,1025
  rectangle: 4730,825 6000,1025
  rectangle: 4190,635 5420,745
Board Shape:
  the board outline again, w1
Mechanical 15:
  region: 3637.95,-314.46 3637.95,-312.92 3639.49,-312.92 3639.49,-314.46
  region: 3668.76,-312.92 3671.84,-312.92 3671.84,-314.46 3668.76,-314.46

## Dimensions
6050,1885 to 6050,0 on Mechanical 1
0,1865 to 6070,1865 on Mechanical 1